# EAGLE board backpac_panel (EAGLE 5.11)
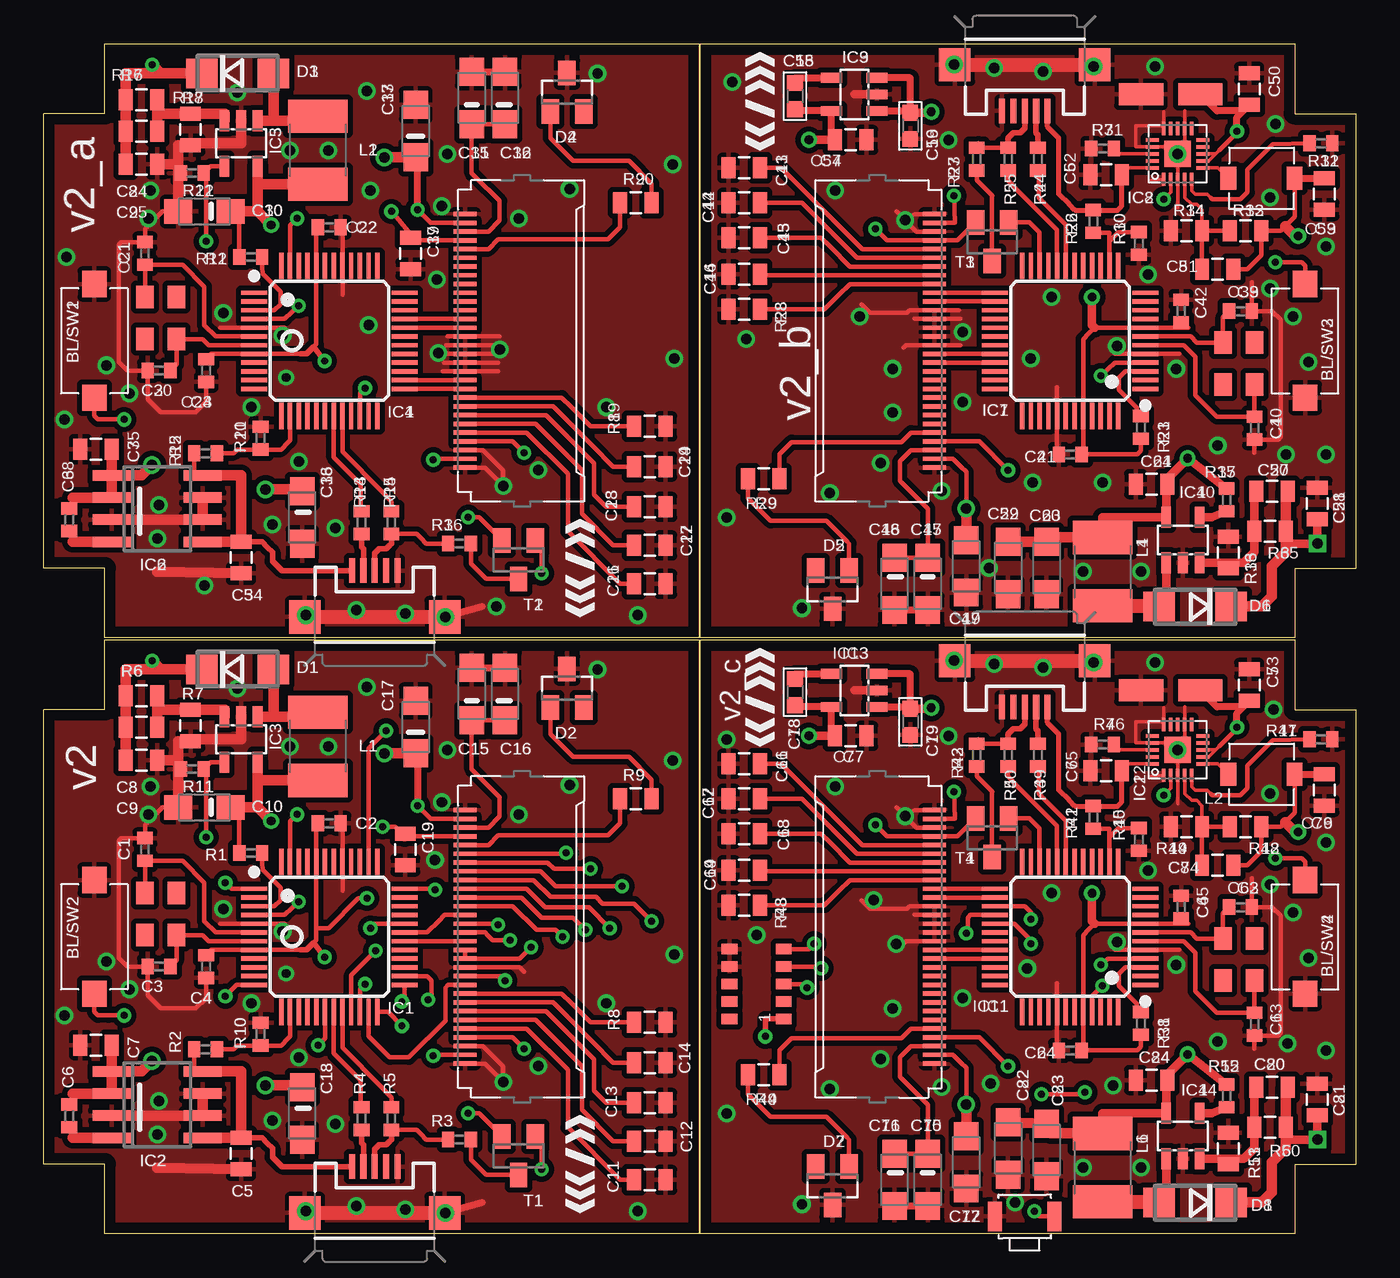
[diagram p0: board, top side]
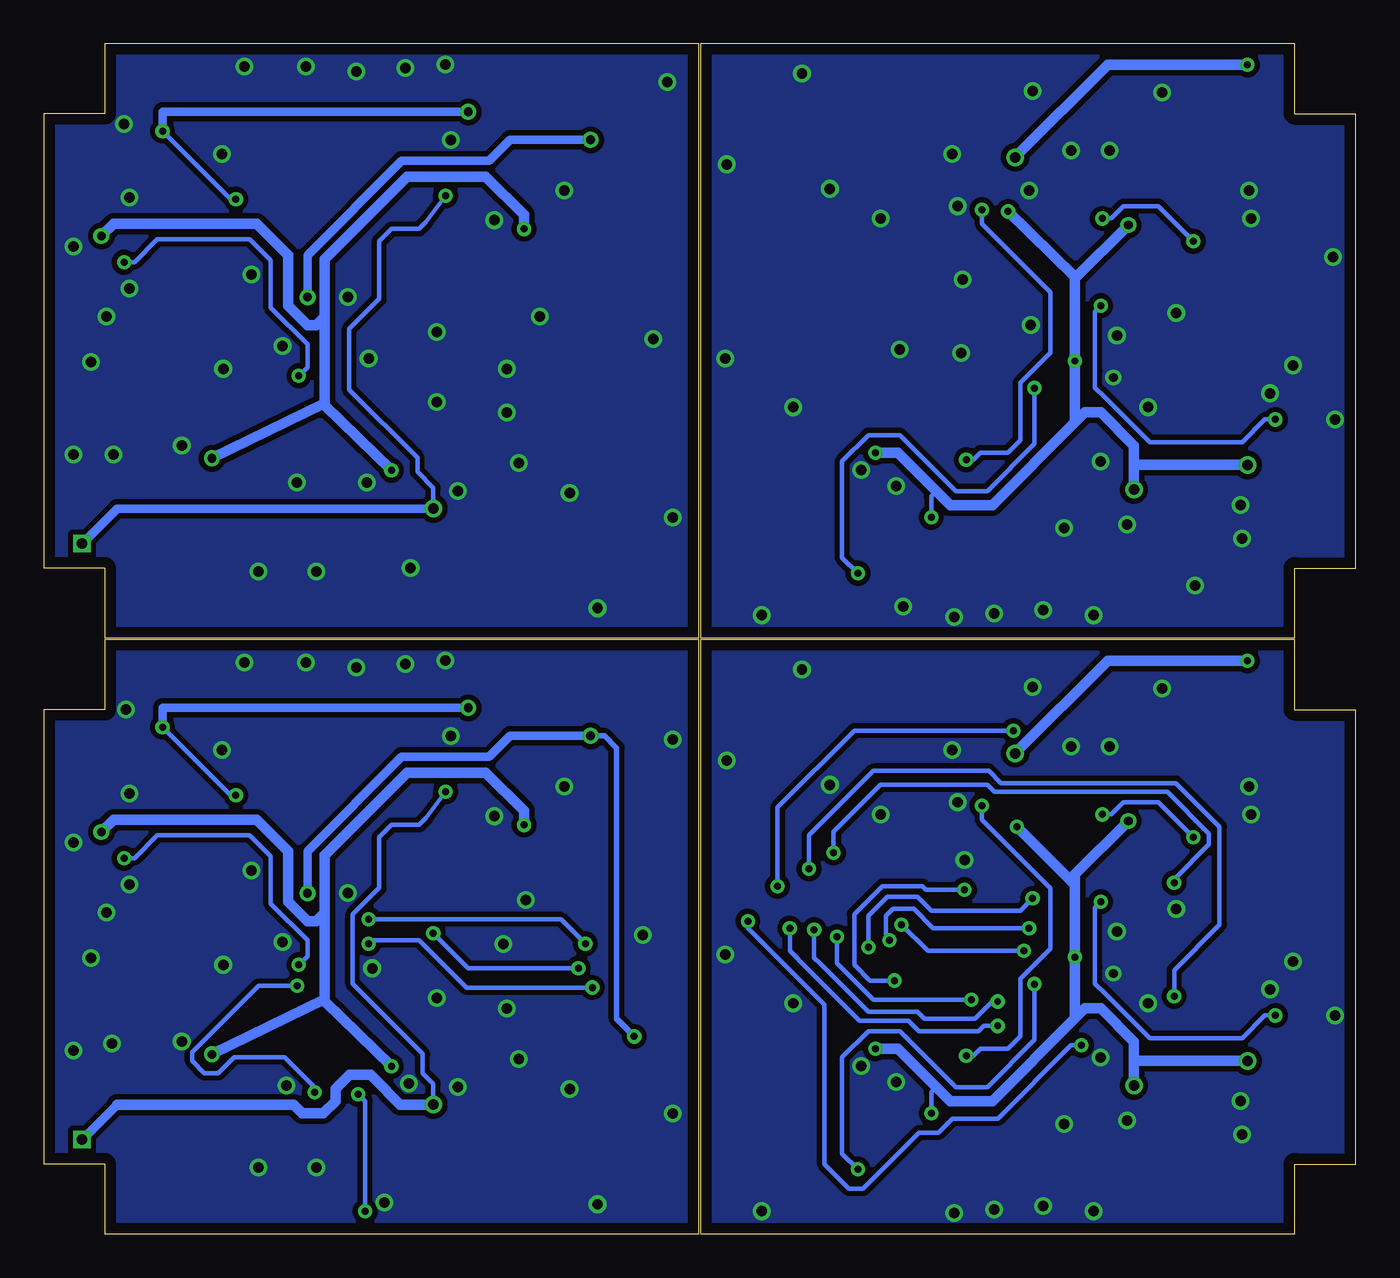
[diagram p1: board, bottom side, seen from below]

Size 75.1 x 68.1 mm. Coordinates in mm from the lower left corner, seen from the top.
Outline: 37.5,34 37.5,0 3.5,0 3.5,4 0,4 0,30 3.5,30 3.5,34 37.5,34
Outline: 37.5,68.1 37.5,34.1 3.5,34.1 3.5,38.1 0,38.1 0,64.1 3.5,64.1 3.5,68.1 37.5,68.1
Outline: 37.6,34.1 37.6,68.1 71.6,68.1 71.6,64.1 75.1,64.1 75.1,38.1 71.6,38.1 71.6,34.1 37.6,34.1
Outline: 37.6,0 37.6,34 71.6,34 71.6,30 75.1,30 75.1,4 71.6,4 71.6,0 37.6,0
Copper layers (1*16): Top 0.035mm / dielectric 1.5mm / Bottom 0.035mm
Design rules "default *": minimum track width 9mil, minimum drill 0.4mm, track to track 8mil, track to pad 8mil, pad to pad 8mil, via to via 8mil, smd to smd 8mil, copper to edge 25mil, drill to drill 8mil, minimum pad ring 10mil, minimum via ring 8mil, stop-mask expansion 4mil, vias tented up to drill 30mil, thermal gap 10mil

## Footprints (pad centres in the part's own frame; a part is rotated, then mirrored left to right if it is on the bottom)
SWITCH_MCTAEF = smd 1.5 x 1.4: 1 -3.25,0; 2 3.25,0
C0402 = smd 0.7 x 0.9: 1 -0.65,0; 2 0.65,0
0805 = smd 0.8 x 1.2: 1 -0.9,0; 2 0.9,0
SMC_A = smd 1.6 x 1.4: + -1.5,0; - 1.5,0
0603-MINI = smd 0.9 x 0.9: 1 -0.75,0; 2 0.75,0
DO214AC = smd 1.8 x 1.7: A 2.05,0; C -2.05,0
SOT23 = smd 1 x 1.4: 1 -0.95,-1.1; 2 0.95,-1.1; 3 0,1.1
LQFP48 = smd 1.5 x 0.25: 1 -4.3,2.75; 2 -4.3,2.25; 3 -4.3,1.75; 4 -4.3,1.25; 5 -4.3,0.75; 6 -4.3,0.25; 7 -4.3,-0.25; 8 -4.3,-0.75; 9 -4.3,-1.25; 10 -4.3,-1.75; 11 -4.3,-2.25; 12 -4.3,-2.75; 25 4.3,-2.75; 26 4.3,-2.25; 27 4.3,-1.75; 28 4.3,-1.25; 29 4.3,-0.75; 30 4.3,-0.25; 31 4.3,0.25; 32 4.3,0.75; 33 4.3,1.25; 34 4.3,1.75; 35 4.3,2.25; 36 4.3,2.75 | smd 0.25 x 1.5: 13 -2.75,-4.3; 14 -2.25,-4.3; 15 -1.75,-4.3; 16 -1.25,-4.3; 17 -0.75,-4.3; 18 -0.25,-4.3; 19 0.25,-4.3; 20 0.75,-4.3; 21 1.25,-4.3; 22 1.75,-4.3; 23 2.25,-4.3; 24 2.75,-4.3; 37 2.75,4.3; 38 2.25,4.3; 39 1.75,4.3; 40 1.25,4.3; 41 0.75,4.3; 42 0.25,4.3; 43 -0.25,4.3; 44 -0.75,4.3; 45 -1.25,4.3; 46 -1.75,4.3; 47 -2.25,4.3; 48 -2.75,4.3
SOIC8 = smd 0.6 x 2.2: 1 -1.905,-2.6; 2 -0.635,-2.6; 3 0.635,-2.6; 4 1.905,-2.6; 5 1.905,2.6; 6 0.635,2.6; 7 -0.635,2.6; 8 -1.905,2.6
SOT23-5L = smd 0.55 x 1.2: 1 -0.95,-1.3; 2 0,-1.3; 3 0.95,-1.3; 4 0.95,1.3; 5 -0.95,1.3
UD-QFN20 = smd 0.751 x 0.2: 1 -1.451,0.8; 2 -1.451,0.4; 3 -1.451,0; 4 -1.451,-0.4; 5 -1.451,-0.8; 11 1.451,-0.8; 12 1.451,-0.4; 13 1.451,0; 14 1.451,0.4; 15 1.451,0.8 | smd 0.2 x 0.751: 6 -0.8,-1.451; 7 -0.4,-1.451; 8 0,-1.451; 9 0.4,-1.451; 10 0.8,-1.451; 16 0.8,1.451; 17 0.4,1.451; 18 0,1.451; 19 -0.4,1.451; 20 -0.8,1.451 | smd 1.5 x 1.5: 21 0,0
RV-2123-C2 = smd 0.6 x 0.9: 1 -2,-1.55; 2 -1,-1.55; 3 0,-1.55; 4 1,-1.55; 5 2,-1.55; 6 2,1.55; 7 1,1.55; 8 0,1.55; 9 -1,1.55; 10 -2,1.55
XF2H-3015-1LW = smd 1.3 x 0.25: 1 3.175,7.25; 2 3.175,6.75; 3 3.175,6.25; 4 3.175,5.75; 5 3.175,5.25; 6 3.175,4.75; 7 3.175,4.25; 8 3.175,3.75; 9 3.175,3.25; 10 3.175,2.75; 11 3.175,2.25; 12 3.175,1.75; 13 3.175,1.25; 14 3.175,0.75; 15 3.175,0.25; 16 3.175,-0.25; 17 3.175,-0.75; 18 3.175,-1.25; 19 3.175,-1.75; 20 3.175,-2.25; 21 3.175,-2.75; 22 3.175,-3.25; 23 3.175,-3.75; 24 3.175,-4.25; 25 3.175,-4.75; 26 3.175,-5.25; 27 3.175,-5.75; 28 3.175,-6.25; 29 3.175,-6.75; 30 3.175,-7.25
L1812 = smd 1.9 x 3.4: 1 -1.95,0; 2 1.95,0
VLF4012A = smd 0.9 x 1.3: P$3 -1.9,0; P$4 1.9,0
SMD1,27-2,54 = smd 1.27 x 2.54: 1 0,0
MT = smd 1.3 x 1: 1 1.2,0.9; 2 -1.2,0.9; 3 -1.2,-0.9; 4 1.2,-0.9
R0402 = smd 0.7 x 0.9: 1 -0.65,0; 2 0.65,0
B3U-3000P = smd 0.8 x 1.7: P$1 -1.7,0; P$2 1.7,0
USB-MICROB = smd 0.35 x 1.4: D+ 0,2.65; D- -0.65,2.65; GND 1.3,2.65; ID 0.65,2.65; VBUS -1.3,2.65 | smd 1.8 x 1.9: MT1 -4,0; MT2 4,0; MT3 -4,0; MT4 4,0

## Placement (x,y rotation side)
BL/SW1  SWITCH_MCTAEF  [SWITCH_MCTAEF]  2.9,51.1 270 top
BL/SW2  SWITCH_MCTAEF  [SWITCH_MCTAEF]  2.9,17 270 top
BL/SW3  SWITCH_MCTAEF  [SWITCH_MCTAEF]  72.2,51.1 90 top
BL/SW4  SWITCH_MCTAEF  [SWITCH_MCTAEF]  72.2,17 90 top
C1  22pF  [C0402]  5.8,22 270 top
C2  100nF  [C0402]  16.35,23.5 180 top
C3  22pF  [C0402]  6.6,15.3 0 top
C4  100nF  [C0402]  9.3,15.3 90 top
C5  1µF  [0805]  11.3,4.6 270 top
C6  10nF  [C0402]  1.46,6.76 90 top
C7  1µF  [0805]  3,10.8 180 top
C8  220pF  [0805]  5.6,29 0 top
C9  1µF  [0805]  5.6,27.1 0 top
C10  10µF  [SMC_A]  9.2,24.4 180 top
C11  1µF  [0805]  34.7,3.1 180 top
C12  1µF  [0805]  34.7,5.3 180 top
C13  1µF  [0805]  34.7,7.5 180 top
C14  1µF  [0805]  34.7,9.8 180 top
C15  10µF  [SMC_A]  24.5,30.9 90 top
C16  10µF  [SMC_A]  26.4,30.9 90 top
C17  10µF  [SMC_A]  21.3,29 90 top
C18  10µF  [SMC_A]  14.8,6.9 270 top
C19  1µF  [0805]  20.7,22 270 top
C20  22pF  [C0402]  6.6,49.4 0 top
C21  22pF  [C0402]  5.8,56.1 270 top
C22  100nF  [C0402]  16.35,57.6 180 top
C23  100nF  [C0402]  9.3,49.4 90 top
C24  220pF  [0805]  5.6,63.1 0 top
C25  1µF  [0805]  5.6,61.2 0 top
C26  1µF  [0805]  34.7,37.2 180 top
C27  1µF  [0805]  34.7,39.4 180 top
C28  1µF  [0805]  34.7,41.6 180 top
C29  1µF  [0805]  34.7,43.9 180 top
C30  10µF  [SMC_A]  9.2,58.5 180 top
C31  10µF  [SMC_A]  24.5,65 90 top
C32  10µF  [SMC_A]  26.4,65 90 top
C33  10µF  [SMC_A]  21.3,63.1 90 top
C34  1µF  [0805]  11.3,38.7 270 top
C35  1µF  [0805]  3,44.9 180 top
C36  10µF  [SMC_A]  14.8,41 270 top
C37  1µF  [0805]  21,56.1 270 top
C38  10nF  [C0402]  1.46,40.86 90 top
C39  22pF  [C0402]  68.5,52.8 180 top
C40  22pF  [C0402]  69.3,46.1 90 top
C41  100nF  [C0402]  58.75,44.6 0 top
C42  100nF  [C0402]  65.1,52.8 270 top
C43  1µF  [0805]  40.1,61 0 top
C44  1µF  [0805]  40.1,59 0 top
C45  1µF  [0805]  40.1,57 0 top
C46  1µF  [0805]  40.1,54.9 0 top
C47  10µF  [SMC_A]  50.6,37.2 270 top
C48  10µF  [SMC_A]  48.7,37.2 270 top
C49  10µF  [SMC_A]  52.8,38.2 270 top
C50  10µF  [0805]  69,65.5 90 top
C51  10pF  [0805]  67.2,55.2 0 top
C52  1µF  [0805]  60.8,60.6 0 top
C53  10µF  [0805]  73.3,59.5 90 top
C54  10µF  [0805]  46.2,62.6 180 top
C55  [0603-MINI]  43,65.1 270 top
C56  [0603-MINI]  49.6,63.4 270 top
C57  220pF  [0805]  70.3,42.5 180 top
C58  1µF  [0805]  72.9,41.8 90 top
C59  10µF  [SMC_A]  55.2,38.1 270 top
C60  10µF  [SMC_A]  57.4,38.1 270 top
C61  1µF  [0805]  63.4,42.9 180 top
C62  22pF  [C0402]  68.5,18.7 180 top
C63  22pF  [C0402]  69.3,12 90 top
C64  100nF  [C0402]  58.75,10.5 0 top
C65  100nF  [C0402]  65.1,18.7 270 top
C66  1µF  [0805]  40.1,26.9 0 top
C67  1µF  [0805]  40.1,24.9 0 top
C68  1µF  [0805]  40.1,22.9 0 top
C69  1µF  [0805]  40.1,20.8 0 top
C70  10µF  [SMC_A]  50.6,3.1 270 top
C71  10µF  [SMC_A]  48.7,3.1 270 top
C72  10µF  [SMC_A]  52.8,4.1 270 top
C73  10µF  [0805]  69,31.4 90 top
C74  10pF  [0805]  67.2,21.1 0 top
C75  1µF  [0805]  60.8,26.5 0 top
C76  10µF  [0805]  73.3,25.4 90 top
C77  10µF  [0805]  46.2,28.5 180 top
C78  [0603-MINI]  43,31 270 top
C79  [0603-MINI]  49.6,29.3 270 top
C80  220pF  [0805]  70.3,8.4 180 top
C81  1µF  [0805]  72.9,7.7 90 top
C82  10µF  [SMC_A]  55.2,4.9 270 top
C83  10µF  [SMC_A]  57.4,4.8 270 top
C84  1µF  [0805]  63.4,8.8 180 top
D1  B140F  [DO214AC]  11.1,32.3 0 top
D2  [SOT23]  29.95,31.23 0 top
D3  B140F  [DO214AC]  11.1,66.4 0 top
D4  [SOT23]  29.95,65.33 0 top
D5  [SOT23]  45.15,36.87 180 top
D6  B140F  [DO214AC]  65.9,35.9 180 top
D7  [SOT23]  45.15,2.77 180 top
D8  B140F  [DO214AC]  65.9,1.8 180 top
IC1  [LQFP48]  16.35,17 0 top
IC2  LT1763CS8-3.3  [SOIC8]  6.5,7.4 270 top
IC3  LM27313  [SOT23-5L]  11.3,28.3 180 top
IC4  [LQFP48]  16.35,51.1 0 top
IC5  LM27313  [SOT23-5L]  11.3,62.4 180 top
IC6  LT1763CS8-3.3  [SOIC8]  6.5,41.5 270 top
IC7  [LQFP48]  58.75,51.1 180 top
IC8  LTC3558  [UD-QFN20]  64.9,61.8 90 top
IC9  LT1761  [SOT23-5L]  46.4,65.2 90 top
IC10  LM27313  [SOT23-5L]  65.2,39.7 0 top
IC11  [LQFP48]  58.75,17 180 top
IC12  LTC3558  [UD-QFN20]  64.9,27.7 90 top
IC13  LT1761  [SOT23-5L]  46.4,31.1 90 top
IC14  LM27313  [SOT23-5L]  65.2,5.6 0 top
IC15  RV-2123-C2  [RV-2123-C2]  40.8,14.3 90 top
J1  XF2-3015-1LW  [XF2H-3015-1LW]  27.3,51.1 180 top
J2  XF2-3015-1LW  [XF2H-3015-1LW]  27.3,17 180 top
J3  XF2-3015-1LW  [XF2H-3015-1LW]  47.8,51.1 0 top
J4  XF2-3015-1LW  [XF2H-3015-1LW]  47.8,17 0 top
L1  10µH  [L1812]  15.7,27.9 90 top
L2  10µH  [L1812]  15.7,62 90 top
L3  4,7µF  [VLF4012A]  69.7,60.4 0 top
L4  10µH  [L1812]  60.6,37.9 270 top
L5  4,7µF  [VLF4012A]  69.7,26.3 0 top
L6  10µH  [L1812]  60.6,3.8 270 top
PAD1  [SMD1,27-2,54]  66.2,65.2 270 top
PAD2  [SMD1,27-2,54]  66.2,31.1 270 top
PAD3  [SMD1,27-2,54]  62.8,65.2 270 top
PAD4  [SMD1,27-2,54]  62.8,31.1 270 top
Q1  12Mhz  [MT]  6.7,18.3 270 top
Q2  12Mhz  [MT]  6.7,52.4 270 top
Q3  12Mhz  [MT]  68.4,49.8 90 top
Q4  12Mhz  [MT]  68.4,15.7 90 top
R1  15k  [R0402]  11.85,21.8 180 top
R2  15k  [R0402]  9.27,10.57 180 top
R3  15k  [R0402]  23.8,5.4 0 top
R4  33R  [R0402]  18.2,6.6 270 top
R5  33R  [R0402]  19.9,6.6 270 top
R6  100k  [0805]  5.6,30.8 180 top
R7  10k  [0805]  8.4,29.1 90 top
R8  1M  [0805]  34.7,12.1 0 top
R9  50R  [0805]  33.9,24.9 0 top
R10  15k  [R0402]  12.42,11.43 90 top
R11  15k  [R0402]  8.5,26.6 180 top
R12  15k  [R0402]  11.85,55.9 180 top
R13  33R  [R0402]  18.2,40.7 270 top
R14  33R  [R0402]  19.9,40.7 270 top
R15  15k  [R0402]  9.27,44.67 180 top
R16  15k  [R0402]  23.8,39.5 0 top
R17  100k  [0805]  5.6,64.9 180 top
R18  10k  [0805]  8.4,63.2 90 top
R19  1M  [0805]  34.7,46.2 0 top
R20  50R  [0805]  33.9,59 0 top
R21  15k  [R0402]  12.42,45.53 90 top
R22  15k  [R0402]  8.5,60.7 180 top
R23  15k  [R0402]  62.8,46.15 270 top
R24  33R  [R0402]  56.9,61.5 90 top
R25  33R  [R0402]  55.2,61.5 90 top
R26  15k  [R0402]  60.07,57.93 90 top
R27  15k  [R0402]  53.4,61.5 270 top
R28  1M  [0805]  40.1,52.9 180 top
R29  50R  [0805]  41.2,43.2 180 top
R30  15k  [R0402]  62.68,56.67 270 top
R31  33R  [R0402]  60.6,62.1 0 top
R32  33R  [R0402]  73.1,62.4 180 top
R33  [0805]  68.8,57.4 0 top
R34  [0805]  65.4,57.4 0 top
R35  100k  [0805]  70.2,40.2 0 top
R36  10k  [0805]  67.8,39 270 top
R37  15k  [R0402]  67.7,42 90 top
R38  15k  [R0402]  62.8,12.05 270 top
R39  33R  [R0402]  56.9,27.4 90 top
R40  33R  [R0402]  55.2,27.4 90 top
R41  15k  [R0402]  60.07,23.83 90 top
R42  15k  [R0402]  53.4,27.4 270 top
R43  1M  [0805]  40.1,18.8 180 top
R44  50R  [0805]  41.2,9.1 180 top
R45  15k  [R0402]  62.68,22.57 270 top
R46  33R  [R0402]  60.6,28 0 top
R47  33R  [R0402]  73.1,28.3 180 top
R48  [0805]  68.8,23.3 0 top
R49  [0805]  65.4,23.3 0 top
R50  100k  [0805]  70.2,6.1 0 top
R51  10k  [0805]  67.8,4.9 270 top
R52  15k  [R0402]  67.7,7.9 90 top
T1  BSS84  [SOT23]  27.18,4.48 180 top
T2  BSS84  [SOT23]  27.18,38.58 180 top
T3  BSS84  [SOT23]  54.28,56.78 180 top
T4  BSS84  [SOT23]  54.28,22.68 180 top
U$1  B3U-3000P  [B3U-3000P]  56.15,1 180 top
X1  USB-MICROB  [USB-MICROB]  18.95,1.2 0 top
X2  USB-MICROB  [USB-MICROB]  18.95,35.3 0 top
X3  USB-MICROB  [USB-MICROB]  56.15,66.9 180 top
X4  USB-MICROB  [USB-MICROB]  56.15,32.8 180 top

## Library data of the parts
BL/SW1-BL/SW4 IC3 IC5 IC8-IC10 IC12-IC15 Q1-Q4 U$1 = seb
C1-C4 C6 C10 C15-C18 C20-C23 C30-C33 C36 C38-C42 C47-C49 C59 C60 C62-C65 C70-C72 C82 C83 R1-R5 R10-R16 R21-R27 R30-R32 R37-R42 R45-R47 R52 = rcl
C5 C7-C9 C11-C14 C19 C24-C29 C34 C35 C37 C43-C46 C50-C54 C57 C58 C61 C66-C69 C73-C77 C80 C81 C84 R6-R9 R17-R20 R28 R29 R33-R36 R43 R44 R48-R51 X1-X4 = SparkFun
C55 C56 C78 C79 = microbuilder
D1-D8 = diode
IC1 IC4 IC7 IC11 = microbuilder; DIGIKEY#: 568-4945-ND; MANF: NXP; MANF#: LPC1343FBD48,151
IC2 IC6 = linear-technology
J1-J4 = con-omron; OC_FARNELL: unknown; OC_NEWARK: unknown
L1 L2 L4 L6 = resistor
L3 L5 = seb; PART: VLF4012A
PAD1-PAD4 = wirepad
T1-T4 = transistor-small-signal

## Nets
+3V1: C22.2 C23.2 C30.+ C35.1 C36.+ C37.1 C38.2 IC4.8 IC4.44 IC5.5 IC6.1 IC6.2 J1.4 J1.27 L2.1 R12.2 T2.2
+3V2: C51.2 C53.2 C59.+ C60.+ C61.1 IC10.5 J3.4 J3.27 L3.P$4 L4.1 R33.2 R37.2 T3.2
+3V3: C2.2 C4.2 C6.2 C7.1 C10.+ C18.+ C19.1 IC1.8 IC1.44 IC2.1 IC2.2 IC3.5 J2.4 J2.13 J2.14 J2.27 L1.1 R1.2 T1.2
+3V4: C74.2 C76.2 C82.+ C83.+ C84.1 IC14.5 J4.4 J4.27 L5.P$4 L6.1 R48.2 R52.2 T4.2
+5V: C5.1 IC2.5 IC2.8 R2.2 X1.VBUS
+5V1: C34.1 IC6.5 IC6.8 R15.2 X2.VBUS
+5V2: C52.2 IC8.20 R26.2 X3.VBUS
+5V3: C75.2 IC12.20 R41.2 X4.VBUS
+12V: C8.1 C9.1 C17.+ D1.C J2.2 J2.29 R6.2
+12V1: C24.1 C25.1 C33.+ D3.C J1.2 J1.29 R17.2
+12V2: C49.+ C57.1 C58.1 D6.C J3.2 J3.29 R35.2
+12V3: C72.+ C80.1 C81.1 D8.C J4.2 J4.29 R50.2
BAT: C50.1 C56.1 IC8.2 IC8.7 IC8.8 IC9.1 IC9.3 PAD1.1
BAT1: C73.1 C79.1 IC12.2 IC12.7 IC12.8 IC13.1 IC13.3 PAD2.1
D0: IC1.21 J2.17
D1: IC1.31 J2.18
D2: IC1.26 J2.19
D3: IC1.25 J2.20
D4: IC1.24 J2.21
D5: IC1.18 J2.22
D6: IC1.38 J2.23
D7: IC1.12 J2.24
D8: IC1.1 J2.25
D9: IC4.33 J1.18
D10: IC4.32 J1.17
D11: IC7.33 J3.18
D12: IC7.32 J3.17
D13: IC11.33 J4.18
D14: IC11.32 J4.17
D/C: IC1.36 J2.11
D/C1: IC4.26 J1.11
D/C2: IC7.26 J3.11
D/C3: IC11.26 J4.11
E: IC1.32 J2.16
ENABLE_OUTPUT: IC8.5 R32.2
ENABLE_OUTPUT1: IC12.5 R47.2
GND: BL/SW2.1 C1.1 C2.1 C3.1 C4.1 C5.2 C7.2 C9.2 C10.- C11.1 C12.1 C13.1 C14.1 C15.- C16.- C17.- C18.- C19.2 D2.3 IC1.5 IC1.41 IC2.3 IC2.6 IC2.7 IC3.2 J2.1 J2.3 J2.12 J2.30 R7.1 R8.2 R10.2 R11.2 X1.GND X1.MT1 X1.MT2 X1.MT3 X1.MT4
GND1: BL/SW1.1 C20.1 C21.1 C22.1 C23.1 C25.2 C26.1 C27.1 C28.1 C29.1 C30.- C31.- C32.- C33.- C34.2 C35.2 C36.- C37.2 D4.3 IC4.5 IC4.41 IC5.2 IC6.3 IC6.6 IC6.7 J1.1 J1.3 J1.12 J1.13 J1.14 J1.15 J1.16 J1.30 R18.1 R19.2 R21.2 R22.2 X2.GND X2.MT1 X2.MT2 X2.MT3 X2.MT4
GND2: BL/SW3.1 C39.1 C40.1 C41.1 C42.1 C43.1 C44.1 C45.1 C46.1 C47.- C48.- C49.- C50.2 C52.1 C53.1 C54.1 C56.2 C58.2 C59.- C60.- C61.2 D5.3 IC7.5 IC7.41 IC8.1 IC8.3 IC8.12 IC8.15 IC8.17 IC8.21 IC9.2 IC10.2 J3.1 J3.3 J3.12 J3.13 J3.14 J3.15 J3.16 J3.30 PAD3.1 R28.2 R30.2 R31.1 R32.1 R34.1 R36.1 X3.GND X3.MT1 X3.MT2 X3.MT3 X3.MT4
GND3: BL/SW4.1 C62.1 C63.1 C64.1 C65.1 C66.1 C67.1 C68.1 C69.1 C70.- C71.- C72.- C73.2 C75.1 C76.1 C77.1 C79.2 C81.2 C82.- C83.- C84.2 D7.3 IC11.5 IC11.41 IC12.1 IC12.3 IC12.12 IC12.15 IC12.17 IC12.21 IC13.2 IC14.2 IC15.6 IC15.7 J4.1 J4.3 J4.12 J4.13 J4.14 J4.15 J4.16 J4.30 PAD4.1 R43.2 R45.2 R46.1 R47.1 R49.1 R51.1 U$1.P$2 X4.GND X4.MT1 X4.MT2 X4.MT3 X4.MT4
IREF: J2.9 R8.1
IREF1: J1.9 R19.1
IREF2: J3.9 R28.1
IREF3: J4.9 R43.1
MISO: IC11.27 IC15.5
MOSI: IC11.28 IC15.4
N$1: D1.A IC3.1 L1.2
N$2: D2.1 R9.2
N$3: C3.2 IC1.7 Q1.1
N$4: C1.2 IC1.6 Q1.3
N$5: C6.1 IC2.4
N$6: C8.2 IC3.3 R6.1 R7.2
N$7: IC1.3 R1.1
N$8: R3.2 T1.3
N$9: IC1.22 T1.1
N$10: R3.1 R5.2 X1.D+
N$11: R4.2 X1.D-
N$12: IC1.14 R2.1 R10.1
N$13: C20.2 IC4.7 Q2.1
N$14: IC1.19 R4.1
N$15: C21.2 IC4.6 Q2.3
N$16: IC4.3 R12.1
N$17: BL/SW1.2 IC4.4
N$18: R14.2 R16.1 X2.D+
N$19: R13.2 X2.D-
N$20: IC4.19 R13.1
N$21: BL/SW2.2 IC1.4
N$22: IC4.14 R15.1 R21.1
N$23: IC4.20 R14.1
N$24: IC1.20 R5.1
N$25: D3.A IC5.1 L2.2
N$26: C24.2 IC5.3 R17.1 R18.2
N$27: D4.1 R20.2
N$28: C38.1 IC6.4
N$29: R16.2 T2.3
N$30: IC4.22 T2.1
N$31: C39.2 IC7.7 Q3.1
N$32: C40.2 IC7.6 Q3.3
N$33: IC7.3 R23.1
N$34: BL/SW3.2 IC7.4
N$35: R25.2 R27.1 X3.D+
N$36: R24.2 X3.D-
N$37: IC7.19 R24.1
N$38: IC7.14 R26.1 R30.1
N$39: IC7.20 R25.1
N$40: D5.1 R29.2
N$41: R27.2 T3.3
N$42: IC7.22 T3.1
N$43: IC8.18 R31.2
N$44: C51.1 IC8.4 R33.1 R34.2
N$45: IC8.6 L3.P$3
N$46: C55.1 IC9.4
N$47: D6.A IC10.1 L4.2
N$48: C57.2 IC10.3 R35.1 R36.2
N$49: C62.2 IC11.7 Q4.1
N$50: C63.2 IC11.6 Q4.3
N$51: IC11.3 R38.1
N$52: BL/SW4.2 IC11.4
N$53: R40.2 R42.1 X4.D+
N$54: R39.2 X4.D-
N$55: IC11.19 R39.1
N$56: IC11.14 R41.1 R45.1
N$57: IC11.20 R40.1
N$58: D7.1 R44.2
N$59: R42.2 T4.3
N$60: IC11.22 T4.1
N$61: IC12.18 R46.2
N$62: C74.1 IC12.4 R48.1 R49.2
N$63: IC12.6 L5.P$3
N$64: C78.1 IC13.4
N$65: D8.A IC14.1 L6.2
N$66: C80.2 IC14.3 R50.1 R51.2
N$67: IC11.45 U$1.P$1
R/W: IC1.30 J2.15
REG_EN: IC1.47 IC3.4 R11.1
REG_EN1: IC4.47 IC5.4 R22.1
REG_EN2: IC7.47
REG_EN3: IC11.47
REG_EN_: IC10.4 R37.1
REG_EN_1: IC14.4 R52.1
RES: IC1.23 J2.10
RES1: IC4.25 J1.10
RES2: IC7.25 J3.10
RES3: IC11.25 J4.10
SCK: IC11.29 IC15.3
VBREF: C11.2 J2.5
VBREF1: C26.2 J1.5
VBREF2: C43.2 J3.5
VBREF3: C66.2 J4.5
VCC: IC8.16
VCC1: IC12.16
VCOMH: C15.+ C16.+ J2.28
VCOMH1: C31.+ C32.+ J1.28
VCOMH2: C47.+ C48.+ J3.28
VCOMH3: C70.+ C71.+ J4.28
VDD: C41.2 C42.2 C54.2 C55.2 IC7.8 IC7.44 IC9.5 R23.2
VDD1: C64.2 C65.2 C77.2 C78.2 IC11.8 IC11.44 IC13.5 IC15.1 R38.2
VPA: C12.2 J2.6
VPA1: C27.2 J1.6
VPA2: C44.2 J3.6
VPA3: C67.2 J4.6
VPB: C13.2 J2.7
VPB1: C28.2 J1.7
VPB2: C45.2 J3.7
VPB3: C68.2 J4.7
VPC: C14.2 J2.8
VPC1: C29.2 J1.8
VPC2: C46.2 J3.8
VPC3: C69.2 J4.8
VSL: J2.26 R9.1
VSL1: J1.26 R20.1
VSL2: J3.26 R29.1
VSL3: J4.26 R44.1

## Tracks (layer width: path | path; a pad name or v marks a point on that pad's centre or on a via)
+3V1  (via drill 0.4, 0.5, 0.6)
  Top 0.254: 21.05,56.95 21,57.2 v19.9,58.5 | C22.2 15.6,57.5 IC4.44 15.6,50.9 15.05,50.35 | C23.2 9.6,50.35 IC4.8 14.7,50.35 | v27.5,44.7 26.85,45.35 J1.4 | R12.2 11.18,58.52 12.32,58.42 | C38.2 1.65,41.55 1.65,42.13 | T2.2 24.91,41 v24.3,41 | J1.27 20.85,56.85 21.05,56.95 | 21.05,56.95 C37.1
  Top 0.305: 14.7,50.35 15.05,50.35 15.44,50.75 v16.07,49.95
  Top 0.61: 12.25,58.5 IC5.5 12.25,60.05 L2.1 | 12.25,58.5 C30.+ | IC6.1 4,43.41 | 1.65,42.13 IC6.2 IC6.1 | IC6.1 C35.1 | 12.25,58.5 12.32,58.42 v13.03,57.73 | C36.+ 14.8,42.6 v12.7,42.6 | 21.05,56.95 20.75,56.95 C37.1 | v6.2,44 5.61,43.41 IC6.1
  Bottom 0.254: v24.3,41 24.3,42.2 24,42.5
  Bottom 0.61: v27.5,44.7 26.2,44.7 24,42.5 23.2,41.7 20.8,41.7 16.07,46.43 | 16.07,46.43 v16.07,49.95 16.07,54.77 | v6.2,44 12.7,44 | 12.7,44 v12.7,42.6 | 16.07,46.43 15.5,47 14.6,47 12.7,45.1 12.7,44 | 16.07,54.77 v19.9,58.5 | v13.03,57.73 16.08,54.67 16.07,54.77
+3V2  (via drill 0.4, 0.5)
  Top 0.254: v47.6,57.5 48.25,56.85 J3.4 52.3,56.85 T3.2 | C51.2 68.9,55.2 69.7,56 R33.2 70.8,57.4 71.05,57.65 71.6,58.2 L3.P$4 | J3.27 53.55,45.35 v55.2,43.7
  Top 0.406: L3.P$4 C53.2
  Top 0.5: IC10.5 60.6,41 L4.1 | R37.2 67.6,42.7 67.53,42.77 v65.47,44.38 64.3,43.2 C61.1 64.25,42.85 IC10.5 | IC10.5 63.6,41
  Top 0.61: C59.+ C60.+ 57.65,39.85 L4.1 | v71.8,57.1 71.6,57.1 71.05,57.65
  Bottom 0.61: v47.6,57.5 47.6,58.3 49.8,60.5 54.3,60.5 59.03,55.77 59.03,52.47 | 59.03,47.43 v55.2,43.7 | 59.03,47.43 59.03,52.47 | v65.47,44.38 59.02,47.53 59.03,47.43 | 59.03,52.47 59.5,52 60,52 61.1,53.1 61.1,56 62.9,57.8 71.1,57.8 v71.8,57.1
+3V3  (via drill 0.4, 0.5, 0.6)
  Top 0.254: 20.65,22.75 20.1,23.3 v19.4,23.3 | C2.2 15.6,23.4 IC1.44 15.6,17.5 | C4.2 9.6,16.25 IC1.8 14.7,16.25 | v27.5,10.6 26.85,11.25 J2.4 | R1.2 11.18,24.43 12.32,24.32 | 15.6,17.5 15.6,16.8 15.05,16.25 | C6.2 1.65,7.45 1.65,8.04 | T1.2 24.91,6.9 v24.3,6.9 | J2.27 20.85,22.75 C19.1 | J2.14 J2.13 27.25,15.75 v27.9,16.4 | v18.5,19.2 18,19.2 16.3,17.5 15.6,17.5
  Top 0.305: 14.7,16.25 15.05,16.25 15.44,16.65 v16.07,15.85
  Top 0.61: 12.25,24.4 IC3.5 12.25,25.95 L1.1 | 12.25,24.4 C10.+ | IC2.1 4,9.3 | 1.65,8.04 IC2.2 IC2.1 | IC2.1 C7.1 | 12.25,24.4 12.32,24.32 v13.03,23.62 | C18.+ 14.8,8.5 v12.7,8.5 | 20.65,22.75 20.65,22.85 C19.1 | v6.2,9.9 5.61,9.3 IC2.1
  Bottom 0.254: v24.3,6.9 24.3,8.1 24,8.4 | v27.9,16.4 27.9,18.2 26.8,19.3 25.1,19.3 24.3,18.5 19.2,18.5 v18.5,19.2
  Bottom 0.61: v27.5,10.6 26.2,10.6 24,8.4 23.2,7.6 20.8,7.6 16.07,12.33 | 16.07,12.33 v16.07,15.85 16.07,19.97 | v6.2,9.9 12.7,9.9 | 12.7,9.9 v12.7,8.5 | 16.07,12.33 15.5,12.9 14.6,12.9 12.7,11 12.7,9.9 | 16.07,19.97 v19.4,23.3 | v13.03,23.62 16.08,20.57 16.07,19.97
+3V4  (via drill 0.4, 0.5)
  Top 0.254: v47.6,23.4 48.25,22.75 J4.4 52.3,22.75 T4.2 | C74.2 68.9,21.1 69.7,21.9 R48.2 70.8,23.3 71.05,23.55 71.6,24.1 L5.P$4 | J4.27 53.55,11.25 v55.2,9.6
  Top 0.406: L5.P$4 C76.2
  Top 0.5: IC14.5 60.6,6.9 L6.1 | R52.2 67.6,8.6 67.53,8.68 v65.47,10.28 64.3,9.1 C84.1 64.25,8.75 IC14.5 | IC14.5 63.6,6.9
  Top 0.61: C82.+ C83.+ 57.65,5.75 L6.1 | v71.8,23 71.6,23 71.05,23.55
  Bottom 0.61: v47.6,23.4 47.6,24.2 49.8,26.4 54.3,26.4 59.03,21.67 59.03,18.37 | 59.03,13.33 v55.2,9.6 | 59.03,13.33 59.03,18.37 | v65.47,10.28 59.02,13.43 59.03,13.33 | 59.03,18.37 59.5,17.9 60,17.9 61.1,19 61.1,21.9 62.9,23.7 71.1,23.7 v71.8,23
+5V
  Top 0.254: R2.2 8.62,9.3 IC2.8
  Top 0.305: X1.VBUS 13.65,3.85 13.1,4.4 13.1,4.9 12.8,5.2 12.5,5.5 C5.1
  Top 0.35: 10.9,5.5 11.25,5.85
  Top 0.61: C5.1 9.2,5.5 IC2.5 10.9,5.5 C5.1 | C5.1 11.3,9.3 IC2.8
+5V1
  Top 0.254: R15.2 8.62,43.41 IC6.8
  Top 0.305: X2.VBUS 13.65,37.95 13.1,38.5 13.1,39 12.8,39.3 12.5,39.6 C34.1
  Top 0.35: 10.9,39.59 11.25,39.95
  Top 0.61: C34.1 9.2,39.59 IC6.5 10.9,39.59 C34.1 | C34.1 11.3,43.41 IC6.8
+5V2
  Top 0.2: IC8.20 62.1,61 C52.2
  Top 0.3: X3.VBUS 57.45,63.35 58.1,62.7 58.1,59.5 58.7,58.9 59.02,58.58 R26.2 61.48,58.58 61.6,58.7 61.7,58.8 C52.2
+5V3
  Top 0.2: IC12.20 62.1,26.9 C75.2
  Top 0.3: X4.VBUS 57.45,29.25 58.1,28.6 58.1,25.4 58.7,24.8 59.02,24.48 R41.2 61.48,24.48 61.6,24.6 61.7,24.7 C75.2
+12V  (via drill 0.4, 0.6)
  Top 0.254: v21.4,24.5 22.15,23.75 J2.29 | 22.35,10.25 v22.3,10.2 22.35,10.25 | 22.35,10.25 J2.2
  Top 0.406: C17.+ 21.4,27.4 v21.4,24.5
  Top 0.61: C9.1 C8.1 R6.2 4.7,32.3 D1.C 6.7,32.3 v6.2,32.8 | v19.5,27.5 C17.+
  Bottom 0.254: v21.4,24.5 21.4,23.7 17.49,19.79 17.49,16.31 19.2,14.6 19.2,11.3 19.9,10.6 21.5,10.6 21.9,10.2 v22.3,10.2
  Bottom 0.61: v6.2,32.8 13.4,32.8 14.2,32.8 v19.5,27.5
+12V1  (via drill 0.4, 0.6)
  Top 0.254: v21.4,58.6 22.15,57.85 J1.29 | 22.35,44.35 v22.3,44.3 22.35,44.35 | 22.35,44.35 J1.2
  Top 0.406: C33.+ 21.4,61.5 v21.4,58.6
  Top 0.61: C25.1 C24.1 R17.2 4.7,66.4 D3.C 6.7,66.4 v6.2,66.9 | C33.+ v19.5,61.6
  Bottom 0.254: v21.4,58.6 21.4,57.8 17.49,53.89 17.49,50.41 19.2,48.7 19.2,45.4 19.9,44.7 21.5,44.7 21.9,44.3 v22.3,44.3
  Bottom 0.61: v6.2,66.9 13.4,66.9 14.2,66.9 v19.5,61.6
+12V2  (via drill 0.4, 0.6)
  Top 0.254: 52.15,57.85 v52.1,59.4 52.15,57.85 | 52.15,57.85 J3.2 | J3.29 52.05,44.35 52.5,43.9 52.8,43.6 v52.8,41.5
  Top 0.406: C49.+ v52.8,41.5
  Top 0.5: D6.C 68.25,36 | C58.1 v72.9,39.5 71.1,39.5 71.1,42.4
  Top 0.61: C49.+ v52.8,41.5 | C57.1 71.1,42.4 R35.2 71.1,39 70.3,38.2 70.3,36.5 70,36.2 69.7,35.9 D6.C
  Bottom 0.254: v52.1,59.4 53.2,57.9 53.6,57.5 55.2,57.5 55.9,56.8 55.9,53.5 57.61,51.79 57.61,48.31 53.7,44.4 53.7,43.6 52.8,42.7 v52.8,41.5
  Bottom 0.5: v72.9,39.5 70.9,41.5 v52.8,41.5
+12V3  (via drill 0.4, 0.6)
  Top 0.254: 52.15,23.75 v52.1,25.3 52.15,23.75 | 52.15,23.75 J4.2 | J4.29 52.05,10.25 52.5,9.8 52.8,9.5 v52.8,7.4
  Top 0.406: C72.+ v52.8,7.4
  Top 0.5: D8.C 68.25,1.9 | C81.1 v72.9,5.4 71.1,5.4 71.1,8.3
  Top 0.61: C72.+ v52.8,7.4 | C80.1 71.1,8.3 R50.2 71.1,4.9 70.3,4.1 70.3,2.4 70,2.1 69.7,1.8 D8.C
  Bottom 0.254: v52.1,25.3 53.2,23.8 53.6,23.4 55.2,23.4 55.9,22.7 55.9,19.8 57.41,18.29 57.41,14.31 53.4,10.3 53.4,9.2 52.8,8.6 v52.8,7.4
  Bottom 0.5: 70.9,7.4 v72.9,5.4
  Bottom 0.61: v52.8,7.4 54.7,7.4 56.2,8.9 56.4,9.1 57.6,9.1 58.4,8.3 58.4,7.6 59.1,6.9 60.3,6.9 60.8,7.4 70.9,7.4
BAT  (via drill 0.4, 0.5)
  Top 0.2: IC8.8 67.1,61.8 67.3,62 66.7,61.4 IC8.7 | IC8.2 64.5,59.6 v64.1,59.2
  Top 0.254: 67.3,62 68.3,63 v68.3,63.1
  Top 0.406: IC9.3 49.6,66.15 C56.1 49.6,64.25 IC9.1 | 68.65,64.25 C50.1 | 68.65,64.25 68.3,63.9 v68.3,63.1 | PAD1.1 67.15,64.25 68.65,64.25
  Top 0.5: C56.1 50.8,64.15 v50.8,64.2
  Bottom 0.254: v64.1,59.2 64.4,59.2 v68.3,63.1
  Bottom 0.5: v50.8,64.2 68.3,64.2 v68.3,63.1
BAT1  (via drill 0.4, 0.5)
  Top 0.2: IC12.8 67.1,27.7 67.3,27.9 66.7,27.3 IC12.7 | IC12.2 64.5,25.5 v64.1,25.1
  Top 0.254: 67.3,27.9 68.3,28.9 v68.3,29
  Top 0.406: IC13.3 49.6,32.05 C79.1 49.6,30.15 IC13.1 | 68.65,30.15 C73.1 | 68.65,30.15 68.3,29.8 v68.3,29 | PAD2.1 67.15,30.15 68.65,30.15
  Top 0.5: C79.1 50.8,30.05 v50.8,30.1
  Bottom 0.254: v64.1,25.1 64.4,25.1 v68.3,29
  Bottom 0.5: v50.8,30.1 68.3,30.1 v68.3,29
D0  (via drill 0.4)
  Top 0.254: v26,17.7 25.95,17.75 J2.17 | IC1.21 17.6,14.8 v19,16.2
  Bottom 0.254: v19,16.2 24.5,16.2 v26,17.7
D1
  Top 0.254: J2.18 22.95,18.25 22.6,17.9 21.95,17.25 IC1.31
D2  (via drill 0.4)
  Top 0.254: IC1.26 21.95,14.75 22.2,14.5 22.2,13.6 v22,13.4 | J2.19 26.85,18.75 28.2,17.4 29.3,17.4 v29.7,17
  Bottom 0.254: v22,13.4 27.6,13.4 29.35,15.15 29.7,15.5 v29.7,17
D3  (via drill 0.4)
  Top 0.254: IC1.25 20.65,13.45 v20.5,13.3 | J2.20 27.35,19.25 28.5,18.1 30.3,18.1 v31,17.4
  Bottom 0.254: v20.5,13.3 20.8,13.3 21.8,12.3 24.7,12.3 25.1,12.7 27.9,12.7 30.65,15.45 | 30.65,15.45 31,15.8 | 31,15.8 v31,17.4 | 30.65,15.45 31,15.8
D4  (via drill 0.4)
  Top 0.254: IC1.24 19.7,12.7 v20.5,11.9 | v32.4,17.5 31.2,18.7 28.7,18.7 27.65,19.75 J2.21
  Bottom 0.254: v20.5,11.9 21.3,11.9 21.6,11.6 25,11.6 25.6,12.2 28.4,12.2 31.4,15.2 32.4,16.2 v32.4,17.5
D5  (via drill 0.4)
  Top 0.254: IC1.18 16.1,11.2 v15.7,10.8 | v34.8,17.9 33.8,18.9 32,18.9 31.6,19.3 29,19.3 28.05,20.25 J2.22
  Bottom 0.254: v15.7,10.8 16.3,10.8 20.5,6.6 23.1,6.6 23.9,5.8 25,5.8 28.2,2.6 29,2.6 30.4,4 30.4,13.1 32,14.7 34.8,17.5 v34.8,17.9
D6  (via drill 0.4)
  Top 0.254: IC1.38 18.6,27.8 v19.6,28.8 | v33.1,19.9 29.3,19.9 28.45,20.75 J2.23
  Bottom 0.254: v19.6,28.8 28.7,28.8 33.1,24.4 v33.1,19.9
D7  (via drill 0.4)
  Top 0.254: IC1.12 11.05,14.25 v10.4,13.6 | v31.3,20.9 29.6,20.9 | 29.6,20.9 29.2,20.9 | 29.6,20.9 29.2,20.9 | 29.6,20.9 29.2,20.9 | 29.2,20.9 28.85,21.25 J2.24
  Bottom 0.254: v10.4,13.6 10.4,15.1 7.8,17.7 7.8,23.3 10.3,25.8 20.3,25.8 21,26.5 27.6,26.5 31.3,22.8 v31.3,20.9
D8  (via drill 0.4)
  Top 0.254: IC1.1 10.75,19.75 v10.4,20.1 | v29.9,21.8 29.55,21.75 J2.25
  Bottom 0.254: v10.4,20.1 10.4,20.3 8.4,22.3 8.4,22.9 10.8,25.3 20.7,25.3 21.1,25.7 27.2,25.7 29.9,23 v29.9,21.8
D9
  Top 0.254: IC4.33 J1.18
D10
  Top 0.254: IC4.32 J1.17
D11
  Top 0.254: J3.18 IC7.33
D12
  Top 0.254: J3.17 IC7.32
D13
  Top 0.254: J4.18 IC11.33
D14
  Top 0.254: J4.17 IC11.32
D/C  (via drill 0.4)
  Top 0.254: IC1.36 22.35,19.75 v22.4,19.7 | J2.11 26.15,14.75 v26.4,14.5
  Bottom 0.254: v22.4,19.7 24.6,19.7 24.8,19.9 27.1,19.9 28.7,18.3 28.7,15.4 27.8,14.5 v26.4,14.5
D/C1
  Top 0.254: IC4.26 J1.11
D/C2
  Top 0.254: J3.11 IC7.26
D/C3
  Top 0.254: J4.11 IC11.26
E  (via drill 0.4)
  Top 0.254: IC1.32 18.95,17.75 v18.7,17.5 | v26.7,16.8 25.7,16.8 25.4,17.1 25.25,17.25 J2.16
  Bottom 0.254: v18.7,17.5 24.2,17.5 25.3,18.6 26.5,18.6 26.9,18.2 26.9,17 v26.7,16.8
ENABLE_OUTPUT
  Top 0.2: IC8.5 65.7,59.7 65.9,59.5 66.6,59.5 66.8,59.3
  Top 0.254: 66.8,59.3 66.9,59.2 68.5,59.2 68.9,59.6 68.9,60.9 69.7,61.7 70.35,62.35 R32.2
ENABLE_OUTPUT1
  Top 0.2: IC12.5 65.7,25.6 65.9,25.4 66.6,25.4 66.8,25.2
  Top 0.254: 66.8,25.2 66.9,25.1 68.5,25.1 68.9,25.5 68.9,26.8 69.7,27.6 70.35,28.25 R47.2
GND  (via drill 0.5, 0.6)
  Top 0.254: 17.1,19.65 IC1.41 17.1,23.4 C2.1 | C4.1 9.3,13.5 8.7,12.9 6.7,12.9 5.95,13.65 C3.1 4.8,15.3 4.3,15.8 4.3,22.5 4.45,22.65 C1.1 5.8,23.4 6.8,24.4 C10.- | 10.1,17.75 IC1.5 13.8,17.75 13.45,17.3 v13.68,17.3 | J2.1 25.25,9.75 v26.3,8.7 26.3,9.6 25.15,10.75 J2.3 | J2.12 27.25,15.25 27.5,15
  Top 0.406: X1.MT4 25.1,1.8 | C15.- C16.-
  Top 0.61: 7.7,27.1 7.7,28.2 R7.1 8.4,28.3 11.3,28.3 IC3.2 | C10.- 7.7,27.1 | 7.7,27.1 C9.2 | 6.5,3.8 C5.2 | IC2.3 IC2.6 IC2.7
  Top 0.813: X1.MT1 X1.MT4
  other vias: 31.7,32.3 30.1,25.7 11.1,31.2 6.1,25.6 6,24 18.5,31.3 4.9,14 11.9,13.2 6.6,7.6 6.5,5.7 17.9,1.6 20.7,1.4 34,1.3 36,27.1 27.2,24 22.8,24.7 13.88,14.9 22.4,21.4 16.7,6.3 23,1.2 15,1.3 36.1,16 13.1,6.5 23.1,27.7 10.28,18.6 14.6,10.1 32.2,13.2 16.3,27.9 14.1,27.9 28.3,9.6 1.2,12.5 3.6,15.6
  pour Top (isolate 0.305): 38,34.5 0,34.5 0,-0.5 38,-0.5
  pour Bottom (isolate 0.305): 38,34.5 0,34.5 0,-0.5 38,-0.5
GND1  (via drill 0.5, 0.6)
  Top 0.254: 17.1,53.75 IC4.41 17.1,57.5 C22.1 | C23.1 9.3,47.6 8.7,47 6.7,47 5.95,47.75 C20.1 4.8,49.4 4.3,49.9 4.3,56.6 4.45,56.75 C21.1 5.8,57.5 6.8,58.5 C30.- | 10.1,51.85 IC4.5 13.8,51.85 13.45,51.4 v13.68,51.4 | J1.1 25.25,43.85 v26.3,42.8 26.3,43.7 25.15,44.85 J1.3 | v26.1,50.6 26.1,50.85 25,50.85 J1.15 23.02,50.85 | 26.1,51.35 25.1,51.35 J1.16 23.12,51.35 | 26,50.35 25,50.35 24.02,50.35 23.02,50.35 | 26,49.85 24.9,49.85 24.02,49.85 22.93,49.85 | 26,49.35 24.8,49.35 24.02,49.35 22.82,49.35
  Top 0.406: X2.MT4 25.1,35.9 | C31.- C32.-
  Top 0.61: 7.7,61.2 7.7,62.3 R18.1 8.4,62.4 11.3,62.4 IC5.2 | C30.- 7.7,61.2 | 7.7,61.2 C25.2 | 6.5,37.9 C34.2 | IC6.3 IC6.6 IC6.7
  Top 0.813: X2.MT1 X2.MT4
  other vias: 31.7,66.4 30.1,59.8 11.1,65.3 6.1,59.7 6,58.1 18.5,65.4 4.9,48.1 11.9,47.3 6.6,41.7 6.5,39.8 17.9,35.7 20.7,35.5 34,35.4 36,61.2 27.2,58.1 22.8,58.8 13.88,49 22.5,54.6 16.7,40.4 23,35.3 15,35.4 36.1,50.1 13.1,40.6 23.1,61.8 10.28,52.7 14.6,44.2 32.2,47.3 16.3,62 14.1,62 28.3,43.7 1.2,46.6 3.6,49.7 22.6,50.4 18.6,52 25.9,35.9 9.2,37.1 1.3,55.9 18.7,59.7
  pour Top (isolate 0.305): 38,68.6 0,68.6 0,33.6 38,33.6
  pour Bottom (isolate 0.305): 38,68.6 0,68.6 0,33.6 38,33.6
GND2  (via drill 0.6)
  Top 0.2: IC8.21 IC8.3 64.9,58.7 | IC8.1 63.4,60.3 | IC8.21 64.5,62.2 IC8.17 62.5,62.2 62.5,63.4 63.95,63.4 IC8.15 64.1,64.2 | IC8.21 65.3,62.2 65.3,63.2 IC8.12 65.3,64.25
  Top 0.254: 58,48.45 IC7.41 58,44.7 C41.1 | 69.15,54.45 C39.1 70.3,52.8 70.8,52.3 70.8,45.6 70.65,45.45 C40.1 69.3,44.7 | 65,50.35 IC7.5 61.3,50.35 61.65,50.8 v61.42,50.8 | J3.1 49.85,58.35 v49.3,58 49,58.3 | J3.3 49.95,57.35 48.8,58.5 | 49.2,50.7 49.35,50.85 50.85,50.85 J3.16 52.48,50.85 | 52.48,52.35 51.48,52.35 J3.13 50.85,52.35 49.85,52.35 | 46.8,53.2 47.3,52.7 49.4,52.7 49.55,52.85 50.95,52.85 J3.12 52.38,52.85
  Top 0.406: C48.- C47.-
  Top 0.5: 46.4,65.2 IC9.2
  Top 0.813: X3.MT4 X3.MT1
  other vias: 43.4,35.8 45,42.4 60.6,43 73.4,44.6 67.2,45.1 62.8,37.9 70.2,54.1 63.2,54.9 57.7,53.6 73.4,56.5 57.2,66.5 54.4,66.7 39.4,65.9 39.1,41 47.9,44.1 51.4,42.5 52.6,47.6 63.6,66.8 52.1,66.9 60.1,66.8 40.2,51.2 70.5,63.5 56.6,43 64.83,49.5 70.2,59.3 45.3,59.7 71.1,44.6 72.4,49.9 51.8,62.6 56.5,50.1 71.5,52.5 48.6,47 48.6,49.5 52.6,51.6 46.7,52.5 59.5,37.9 54.1,38.1 64.9,61.8
  pour Top (isolate 0.305): 37.1,33.6 75.1,33.6 75.1,68.6 37.1,68.6
  pour Bottom (isolate 0.305): 37.1,33.6 75.1,33.6 75.1,68.6 37.1,68.6
GND3  (via drill 0.6)
  Top 0.2: IC12.21 IC12.3 64.9,24.6 | IC12.1 63.4,26.2 | IC12.21 64.5,28.1 IC12.17 62.5,28.1 62.5,29.3 63.95,29.3 IC12.15 64.1,30.1 | IC12.21 65.3,28.1 IC12.12 65.3,30.15
  Top 0.254: 58,14.35 IC11.41 58,10.6 C64.1 | 69.15,20.35 C62.1 70.3,18.7 70.8,18.2 70.8,11.5 70.65,11.35 C63.1 69.3,10.6 | 65,16.25 IC11.5 61.3,16.25 61.65,16.7 v61.42,16.7 | J4.1 49.85,24.25 v49.3,23.9 49,24.2 | J4.3 49.95,23.25 48.8,24.4 | J4.16 49.35,16.75 49.2,16.6 | 51.48,18.25 J4.13 49.85,18.25 | J4.12 49.55,18.75 49.4,18.6 47.3,18.6 46.8,19.1
  Top 0.406: C71.- C70.-
  Top 0.5: 46.4,31.1 IC13.2
  Top 0.813: X4.MT4 X4.MT1
  other vias: 43.4,1.7 45,8.3 61.2,8.5 73.4,10.5 67.2,11 62.8,3.8 70.2,20 63.2,20.8 57.7,19.5 73.4,22.4 57.2,32.4 54.4,32.6 39.1,28.3 39.1,6.9 47.9,10 51.4,8.4 52.6,13.5 63.6,32.7 52.1,32.8 60.1,32.7 40.8,17.1 70.4,30 54.2,8.6 64.83,15.4 70.2,25.2 45.3,25.6 71.2,10.9 72.4,15.8 51.8,28.5 56.3,15.2 71.5,18.4 48.6,12.9 48.8,16.6 47.5,19.1 59.5,3.8 55.6,1.8 64.9,27.7
  pour Top (isolate 0.305): 37.1,-0.5 75.1,-0.5 75.1,34.5 37.1,34.5
  pour Bottom (isolate 0.305): 37.1,-0.5 75.1,-0.5 75.1,34.5 37.1,34.5
IREF
  Top 0.254: R8.1 31.3,12.1 30.2,13.2 29.65,13.75 J2.9
IREF1
  Top 0.254: R19.1 31.3,46.2 30.2,47.3 29.65,47.85 J1.9
IREF2
  Top 0.254: J3.9 46.15,54.35 45.5,53.7 44.7,52.9 R28.1
IREF3
  Top 0.254: J4.9 46.15,20.25 45.5,19.6 44.7,18.8 R43.1
MISO  (via drill 0.4)
  Top 0.254: IC15.5 43.8,16.3 v44.1,16.6 | v56.5,18 56.5,18.4 56.15,18.75 IC11.27
  Bottom 0.254: v44.1,16.6 45.5,18 v56.5,18
MOSI  (via drill 0.4)
  Top 0.254: IC15.4 44.4,15.3 v44.5,15.2 | v52.8,17.2 52.9,17.3 52.9,18.1 53.05,18.25 IC11.28
  Bottom 0.254: v44.5,15.2 50.8,15.2 v52.8,17.2
N$1
  Top 0.61: L1.2 15.7,29.6 IC3.1 13.15,29.6 D1.A
N$2
  Top 0.254: R9.2 34.8,26 33.5,27.3 30.3,27.3 29.1,28.5 29,28.6 D2.1
N$3
  Top 0.254: IC1.7 9.45,16.75 9.1,17.1 Q1.1 7.6,15.65 C3.2
N$4
  Top 0.254: IC1.6 9.85,17.25 9.2,17.9 9.2,20.1 7.95,21.35 C1.2 Q1.3
N$5
  Top 0.254: C6.1 1.4,5.95 1.77,5.5
  Top 0.61: IC2.4 1.77,5.5 1.68,5.5
N$6
  Top 0.61: IC3.3 10.35,30 R7.2 6.5,30 | C8.2 6.5,30 | 6.5,30 R6.1
N$7
  Top 0.254: IC1.3 13.2,18.75 13.55,19.1 13.55,19.8 12.53,20.82 12.47,21.57 R1.1
N$8
  Top 0.254: T1.3 25.32,3.38 24.45,4.25 R3.2
N$9  (via drill 0.4)
  Top 0.254: IC1.22 18.1,14 v18.4,14.3 | v28.5,3.7 28.5,4.91 T1.1
  Bottom 0.254: v18.4,14.3 18.4,11.1 21.1,8.4 22.9,8.4 26.1,11.6 27.9,11.6 29.4,10.1 29.4,4.6 v28.5,3.7
N$10
  Top 0.254: R3.1 21.9,5.4 21.6,5.7 21.35,5.95 R5.2
  Top 0.305: X1.D+ 18.95,4.85 19.2,5.1 19.6,5.1 19.8,5.3 19.9,5.4 R5.2
N$11
  Top 0.305: X1.D- 18.3,5.1 18.2,5.2 R4.2
N$12
  Top 0.254: R2.1 10.87,10.57 10.9,10.6 11.08,10.78 R10.1 13.58,10.78 14,11.2 14.1,11.3 IC1.14
N$13
  Top 0.254: IC4.7 9.45,50.85 9.1,51.2 Q2.1 7.6,49.75 C20.2
N$14
  Top 0.254: R4.1 18.15,7.55 18.15,8.8 16.6,10.35 IC1.19
N$15
  Top 0.254: IC4.6 9.85,51.35 9.2,52 9.2,54.2 7.95,55.45 C21.2 Q2.3
N$16
  Top 0.254: IC4.3 13.2,52.85 13.55,53.2 13.55,53.9 12.53,54.92 12.47,55.67 R12.1
N$17  (via drill 0.4)
  Top 0.254: IC4.4 13.8,52.35 v14.6,53.1 | BL/SW1.2 2.9,46.8 3.1,46.6 3.7,46.6 v4.6,46.6
  Bottom 0.254: v14.6,53.1 14.93,52.77 14.93,49.38 14.93,48.42 14.4,47.9 11.8,45.3 6.5,45.3 5.2,46.6 v4.6,46.6
N$18
  Top 0.254: R16.1 21.9,39.5 21.6,39.8 21.35,40.05 R14.2
  Top 0.305: X2.D+ 18.95,38.95 19.2,39.2 19.6,39.2 19.8,39.4 19.9,39.5 R14.2
N$19
  Top 0.305: X2.D- 18.3,39.2 18.2,39.3 R13.2
N$20
  Top 0.254: R13.1 18.15,41.65 18.15,42.9 16.6,44.45 IC4.19
N$21  (via drill 0.4)
  Top 0.254: IC1.4 13.8,18.25 v14.6,19 | BL/SW2.2 2.9,12.7 3.1,12.5 3.7,12.5 v4.6,12.5
  Bottom 0.254: v14.6,19 14.93,18.68 14.93,15.28 14.93,14.32 14.4,13.8 11.8,11.2 6.5,11.2 5.2,12.5 v4.6,12.5
N$22
  Top 0.254: R15.1 10.87,44.67 10.9,44.7 11.08,44.88 R21.1 13.58,44.88 14,45.3 14.1,45.4 IC4.14
N$23
  Top 0.254: IC4.20 17.1,44.75 19.35,42.5 19.9,41.9 R14.1
N$24
  Top 0.254: IC1.20 17.1,10.65 19.35,8.4 19.9,7.8 R5.1
N$25
  Top 0.61: L2.2 15.7,63.7 IC5.1 13.15,63.7 D3.A
N$26
  Top 0.61: IC5.3 10.35,64.1 R18.2 6.5,64.1 | C24.2 6.5,64.1 | 6.5,64.1 R17.1
N$27
  Top 0.254: R20.2 34.8,60.1 33.5,61.4 30.3,61.4 29.1,62.6 29,62.7 D4.1
N$28
  Top 0.254: C38.1 1.4,40.05 1.77,39.59
  Top 0.61: IC6.4 1.77,39.59 1.68,39.59
N$29
  Top 0.254: T2.3 25.32,37.48 24.45,38.35 R16.2
N$30  (via drill 0.4)
  Top 0.254: IC4.22 18.1,48.1 v18.4,48.4 | v28.5,37.8 28.5,39.01 T2.1
  Bottom 0.254: v18.4,48.4 18.4,45.2 21.1,42.5 22.9,42.5 26.1,45.7 27.9,45.7 29.4,44.2 29.4,38.7 v28.5,37.8
N$31
  Top 0.254: IC7.7 65.65,51.35 66,51 Q3.1 67.5,52.45 C39.2
N$32
  Top 0.254: IC7.6 65.25,50.85 65.9,50.2 65.9,48 67.15,46.75 C40.2 Q3.3
N$33
  Top 0.254: IC7.3 61.9,49.35 61.55,49 61.55,48.3 62.58,47.27 62.62,46.52 R23.1
N$34  (via drill 0.4)
  Top 0.254: IC7.4 61.3,49.85 v60.5,49.1 | BL/SW3.2 72.2,55.4 72,55.6 71.4,55.6 v70.5,55.6
  Bottom 0.254: v70.5,55.6 69.9,55.6 68.6,56.9 63.3,56.9 62.1,55.7 62.1,53 60,50.9 60,49.6 v60.5,49.1 60.7,49.3
N$35
  Top 0.254: R27.1 53.4,62.2 53.5,62.4 53.75,62.15 R25.2
  Top 0.305: X3.D+ 56.15,63.25 55.9,63 55.5,63 55.3,62.8 55.2,62.7 R25.2
N$36
  Top 0.305: X3.D- 56.8,63 56.9,62.9 R24.2
N$37
  Top 0.254: R24.1 56.95,60.55 56.95,59.3 58.5,57.75 IC7.19
N$38
  Top 0.254: R30.1 61.52,57.32 61.1,56.9 61,56.8 61,56.1 | IC7.14 61,56.1 | R26.1 61,57.27 61,56.1
N$39
  Top 0.254: IC7.20 58,57.45 55.75,59.7 55.2,60.3 R25.1
N$40
  Top 0.254: R29.2 40.3,42.1 41.6,40.8 44.8,40.8 46,39.6 46.1,39.5 D5.1
N$41
  Top 0.254: R27.2 53.4,60.3 54.3,59.4 54.28,59.38 T3.3
N$42
  Top 0.254: T3.1 56.42,57.88 56.7,57.6 57,57.3 IC7.22
N$43
  Top 0.2: IC8.18 61.25,61.8 R31.2
N$44
  Top 0.2: IC8.4 65.3,59.3 65.7,58.9 66,58.9 66.3,58.6 R34.2
  Top 0.254: R33.1 R34.2 C51.1
N$45
  Top 0.2: IC8.6 67.2,61 L3.P$3
N$46
  Top 0.406: IC9.4 43,66.15 C55.1
N$47
  Top 0.5: IC10.1 64.25,35.9 D6.A
  Top 0.813: L4.2 64.05,35.95 D6.A
N$48
  Top 0.5: IC10.3 67.8,38.4 | 67.8,38.4 R36.2 | 67.8,38.4 68.7,38.4 69.3,39 69.3,39.7 | 69.3,39.7 R35.1 | C57.2 69.3,42.4 69.3,39.7
N$49
  Top 0.254: IC11.7 65.65,17.25 66,16.9 Q4.1 67.5,18.35 C62.2
N$50
  Top 0.254: IC11.6 65.25,16.75 65.9,16.1 65.9,13.9 67.15,12.65 C63.2 Q4.3
N$51
  Top 0.254: IC11.3 61.9,15.25 61.55,14.9 61.55,14.2 62.58,13.18 62.62,12.43 R38.1
N$52  (via drill 0.4)
  Top 0.254: IC11.4 60.9,15.75 v60.5,15.4 | BL/SW4.2 72.2,21.3 72,21.5 71.4,21.5 v70.5,21.5
  Bottom 0.254: v70.5,21.5 69.9,21.5 68.6,22.8 63.3,22.8 62.1,21.6 62.1,18.9 60,16.8 60,15.9 v60.5,15.4
N$53
  Top 0.254: R42.1 53.4,28.1 53.5,28.3 53.75,28.05 R40.2
  Top 0.305: X4.D+ 56.15,29.15 55.9,28.9 55.5,28.9 55.3,28.7 55.2,28.6 R40.2
N$54
  Top 0.305: X4.D- 56.8,28.9 56.9,28.8 R39.2
N$55
  Top 0.254: R39.1 56.95,26.45 56.95,25.2 58.5,23.65 IC11.19
N$56
  Top 0.254: R45.1 61.52,23.22 61.1,22.8 61,22.7 61,22 | IC11.14 61,22 | R41.1 61,23.17 61,22
N$57
  Top 0.254: IC11.20 58,23.35 55.75,25.6 55.2,26.2 R40.1
N$58
  Top 0.254: R44.2 40.3,8 41.6,6.7 44.8,6.7 46,5.5 46.1,5.4 D7.1
N$59
  Top 0.254: R42.2 53.4,26.2 54.3,25.3 54.28,25.28 T4.3
N$60
  Top 0.254: T4.1 56.42,23.78 56.7,23.5 57,23.2 IC11.22
N$61
  Top 0.2: IC12.18 61.25,27.7 R46.2
N$62
  Top 0.2: IC12.4 65.3,25.2 65.7,24.8 66,24.8 66.3,24.5 R49.2
  Top 0.254: R48.1 R49.2 C74.1
N$63
  Top 0.2: IC12.6 67.2,26.9 L5.P$3
N$64
  Top 0.406: IC13.4 43,32.05 C78.1
N$65
  Top 0.5: IC14.1 64.25,1.8 D8.A
  Top 0.813: L6.2 64.05,1.85 D8.A
N$66
  Top 0.5: IC14.3 67.8,4.3 | 67.8,4.3 R51.2 | 67.8,4.3 68.7,4.3 69.3,4.9 69.3,5.6 | 69.3,5.6 R50.1 | C80.2 69.3,8.3 69.3,5.6
N$67  (via drill 0.4)
  Top 0.254: IC11.45 60,13.6 v60.6,14.2 | U$1.P$1 57,1 v56.7,1.3 | v57.1,8 59.5,8 v59.6,8.1
  Bottom 0.254: v60.6,14.2 62.8,14.2 66.6,10.4 66.6,9.9 65.9,9.2 65.1,9.2 64.2,10.1 61.3,10.1 59.6,8.4 v59.6,8.1 | v56.7,1.3 56.7,7.6 v57.1,8
R/W
  Top 0.254: IC1.30 J2.15
REG_EN  (via drill 0.4)
  Top 0.254: v14.5,24 14.1,23.6 IC1.47 | v9.3,22.7 9.3,26.45 | R11.1 9.55,27 IC3.4
  Top 0.406: 9.3,26.45 9.15,26.45 R11.1
  Bottom 0.254: v14.5,24 14,24 13.3,24.7 11.3,24.7 v9.3,22.7
REG_EN1  (via drill 0.4)
  Top 0.254: v14.5,58.1 14.1,57.7 IC4.47 | v9.3,56.8 9.3,60.55 | R22.1 9.55,61.1 IC5.4
  Top 0.406: 9.3,60.55 9.15,60.55 R22.1
  Bottom 0.254: v14.5,58.1 14,58.1 13.3,58.8 11.3,58.8 v9.3,56.8
REG_EN_
  Top 0.5: R37.1 66.85,41 IC10.4
REG_EN_1
  Top 0.5: R52.1 66.85,6.9 IC14.4
RES
  Top 0.254: IC1.23 18.6,11.3 19.8,10.1 20.9,10.1 23,12.2 23,14.1 23.1,14.2 23.15,14.25 J2.10
RES1
  Top 0.254: IC4.25 J1.10
RES2
  Top 0.254: J3.10 IC7.25
RES3
  Top 0.254: J4.10 IC11.25
SCK  (via drill 0.4)
  Top 0.254: IC15.3 43.5,14.3 v43.7,14.1 | v56.5,16.6 56.5,16.8 55.7,17.6 55.55,17.75 IC11.29
  Bottom 0.254: v43.7,14.1 50.9,14.1 53.6,16.8 56.3,16.8 v56.5,16.6
VBREF
  Top 0.254: C11.2 33,3.1 30,6.1 30,9.4 27.65,11.75 26.95,11.75 J2.5
VBREF1
  Top 0.254: C26.2 33,37.2 30,40.2 30,43.5 27.65,45.85 26.95,45.85 J1.5
VBREF2
  Top 0.254: J3.5 46.85,56.35 43.2,60 42.2,61 C43.2
VBREF3
  Top 0.254: J4.5 46.85,22.25 43.2,25.9 42.2,26.9 C66.2
VCOMH
  Top 0.254: C16.+ C15.+ 24.5,26.6 24.7,26.4 26.1,25 26.1,23.9 25.45,23.25 J2.28
VCOMH1
  Top 0.254: C32.+ C31.+ 24.5,60.7 24.7,60.5 26.1,59.1 26.1,58 25.45,57.35 J1.28
VCOMH2
  Top 0.254: C48.+ C47.+ 50.6,41.5 50.4,41.7 49,43.1 49,44.2 49.65,44.85 J3.28
VCOMH3
  Top 0.254: C71.+ C70.+ 50.6,7.4 50.4,7.6 49,9 49,10.1 49.65,10.75 J4.28
VDD  (via drill 0.5)
  Top 0.254: C42.2 65.5,51.85 IC7.8 60.15,51.85 59.8,51.5 59.5,51.2 IC7.44 59.5,44.7 C41.2 62.6,44.6 62.8,44.8 R23.2
  Top 0.406: C54.2 45.1,62.6 IC9.5 43,64.25 C55.2
  Top 0.5: v43.8,62.6 C54.2 | v60,53.6 60,52 60.15,51.85
  Bottom 0.5: v43.8,62.6 48.4,62.6 49.6,61.4 54.6,61.4 60,56 v60,53.6
VDD1  (via drill 0.4, 0.5)
  Top 0.254: C65.2 65.5,17.75 IC11.8 60.15,17.75 59.8,17.4 59.5,17.1 IC11.44 59.5,10.6 C64.2 62.6,10.5 62.8,10.7 R38.2
  Top 0.305: IC15.1 41.3,12.3 v41.3,11.3
  Top 0.406: C77.2 45.1,28.5 IC13.5 43,30.15 C78.2
  Top 0.5: v43.8,28.5 C77.2 | v60,19.5 60,17.9 60.15,17.75
  Bottom 0.305: v41.3,11.3 42.3,12.3 42.3,27.8 43,28.5 v43.8,28.5
  Bottom 0.5: v43.8,28.5 48.4,28.5 49.6,27.3 54.6,27.3 60,21.9 v60,19.5
VPA
  Top 0.254: C12.2 32.6,5.3 30.8,7.1 30.8,9.6 28.5,11.9 28.15,12.25 J2.6
VPA1
  Top 0.254: C27.2 32.6,39.4 30.8,41.2 30.8,43.7 28.5,46 28.15,46.35 J1.6
VPA2
  Top 0.254: J3.6 46.55,55.85 44.7,57.7 43.4,59 C44.2
VPA3
  Top 0.254: J4.6 46.55,21.75 44.7,23.6 43.4,24.9 C67.2
VPB
  Top 0.254: C13.2 32.2,7.5 31.5,8.2 31.5,10 30.1,11.4 28.75,12.75 J2.7
VPB1
  Top 0.254: C28.2 32.2,41.6 31.5,42.3 31.5,44.1 30.1,45.5 28.75,46.85 J1.7
VPB2
  Top 0.254: J3.7 46.15,55.35 45,56.5 44.5,57 C45.2
VPB3
  Top 0.254: J4.7 46.15,21.25 45,22.4 44.5,22.9 C68.2
VPC
  Top 0.254: C14.2 32.6,9.8 31.4,11 29.15,13.25 J2.8
VPC1
  Top 0.254: C29.2 32.6,43.9 31.4,45.1 29.15,47.35 J1.8
VPC2
  Top 0.254: J3.8 41.05,54.85 C46.2
VPC3
  Top 0.254: J4.8 41.05,20.75 C69.2
VSL
  Top 0.254: R9.1 33,23.5 32.3,22.8 26,22.8 25.45,22.25 J2.26
VSL1
  Top 0.254: R20.1 33,57.6 32.3,56.9 26,56.9 25.45,56.35 J1.26
VSL2
  Top 0.254: R29.1 42.1,44.6 42.8,45.3 49.1,45.3 49.65,45.85 J3.26
VSL3
  Top 0.254: R44.1 42.1,10.5 42.8,11.2 49.1,11.2 49.65,11.75 J4.26

## Text on the board
tPlace: v2_a | v2_b | v2_c | v2
tNames: L2
tValues: LPC1343 | 12Mhz | 12Mhz | LPC1343 | LPC1343 | 12Mhz | 12Mhz | LPC1343
bStop: seb@exse.net | oled module v1 | oled module v1 | seb@exse.net | seb@exse.net | oled module v1 | oled module v1 | seb@exse.net
_tNames: IC3 | R6 | C18 | D1 | R7 | C5 | C17 | IC3 | C19 | R7 | L1 | C15 | C16 | D2 | C7 | R3 | R11 | R11 | R9 | C11 | C6 | IC2 | C8 | C10 | R5 | R4 | C9 | C2 | C19 | C12 | R2 | R10 | R14 | R12 | C9 | C1 | R1 | C13 | T1 | C8 | C14 | C3 | BL/SW2 | R8 | C4 | BL/SW2 | C3 | C4 | IC1 | IC1 | R2 | R8 | R1 | R10 | C14 | C24 | C1 | C7 | C2 | R15 | C20 | R4 | R5 | C13 | C6 | C18 | R9 | IC4 | C12 | C22 | C23 | C21 | R3 | D2 | C16 | C15 | L1 | R13 | R6 | IC2 | C11 | C5 | T1 | D1 | C17 | IC3 | R6 | D1 | R7 | C5 | C17 | C18 | IC3 | C19 | R7 | R11 | L1 | C15 | C16 | D2 | C7 | R3 | R11 | R9 | C11 | C6 | C8 | C10 | R5 | R4 | IC2 | C9 | C2 | C19 | C12 | R2 | C9 | C1 | R1 | C13 | T1 | R10 | R14 | R12 | C8 | C14 | C3 | BL/SW2 | R8 | C4 | BL/SW2 | C3 | C4 | IC1 | IC1 | R2 | R8 | R1 | R10 | C14 | C1 | C7 | C2 | C24 | R15 | C20 | R4 | R5 | C22 | C23 | C6 | C18 | C13 | R9 | IC4 | C21 | R3 | C12 | D2 | C16 | C15 | L1 | R13 | IC2 | C11 | R6 | C5 | T1 | D1 | C17
_tValues: B140F | 100k | LM27313 | 10µF | 10µF | 10µF | 10µF | 33R | 220pF | 10k | XF2-3015-1LW | LT1761 | 10µH | 10µF | 15k | 1µF | 15k | 1µF | 33R | 33R | 33R | 10µF | 50R | 1µF | 1µF | LTC3558 | 100nF | BSS84 | 15k | 10µF | 22pF | 1µF | 1µF | 15k | 15k | 1µF | 100nF | 10pF | 1M | 22pF | 22pF | 100nF | 15k | 1M | 1µF | 15k | 15k | 22pF | 1µF | 100nF | 1µF | 220pF | LT1763CS8-3.3 | 50R | 33R | 33R | 1µF | 10µF | 15k | 1µF | 10nF | 1µF | BSS84 | 1µF | 10µF | 10µF | 10µF | 10µH | 10k | 15k | XF2-3015-1LW | 100k | 10µF | 10µF | B140F | 1µF | LM27313 | B140F | 100k | LM27313 | 10µF | 10µF | 10µF | 10µF | 33R | 220pF | XF2-3015-1LW | LT1761 | 10k | 10µH | 10µF | 15k | 1µF | 15k | 1µF | 33R | 33R | 33R | 10µF | 50R | 1µF | 1µF | LTC3558 | 100nF | BSS84 | 10µF | 22pF | 1µF | 1µF | 15k | 15k | 15k | 1µF | 100nF | 10pF | 1M | 22pF | 22pF | 100nF | 15k | 1M | 1µF | 15k | 15k | 22pF | 1µF | 100nF | 1µF | 220pF | LT1763CS8-3.3 | 50R | 33R | 1µF | 10µF | 33R | 15k | 1µF | 10nF | 1µF | BSS84 | 1µF | 10µF | 10µF | 10µH | 10k | 15k | XF2-3015-1LW | 10µF | 100k | 10µF | 10µF | B140F | 1µF | LM27313